# Altium PCB genericShield.PcbDoc
Units mm, origin at the board's own origin, x right, y up, seen from the top; angles counter-clockwise.
Board outline 67.89 x 33.03 mm, 2 copper layers (Top Layer, Bottom Layer); 1 components, 9 nets, 40 pads, 0 vias.
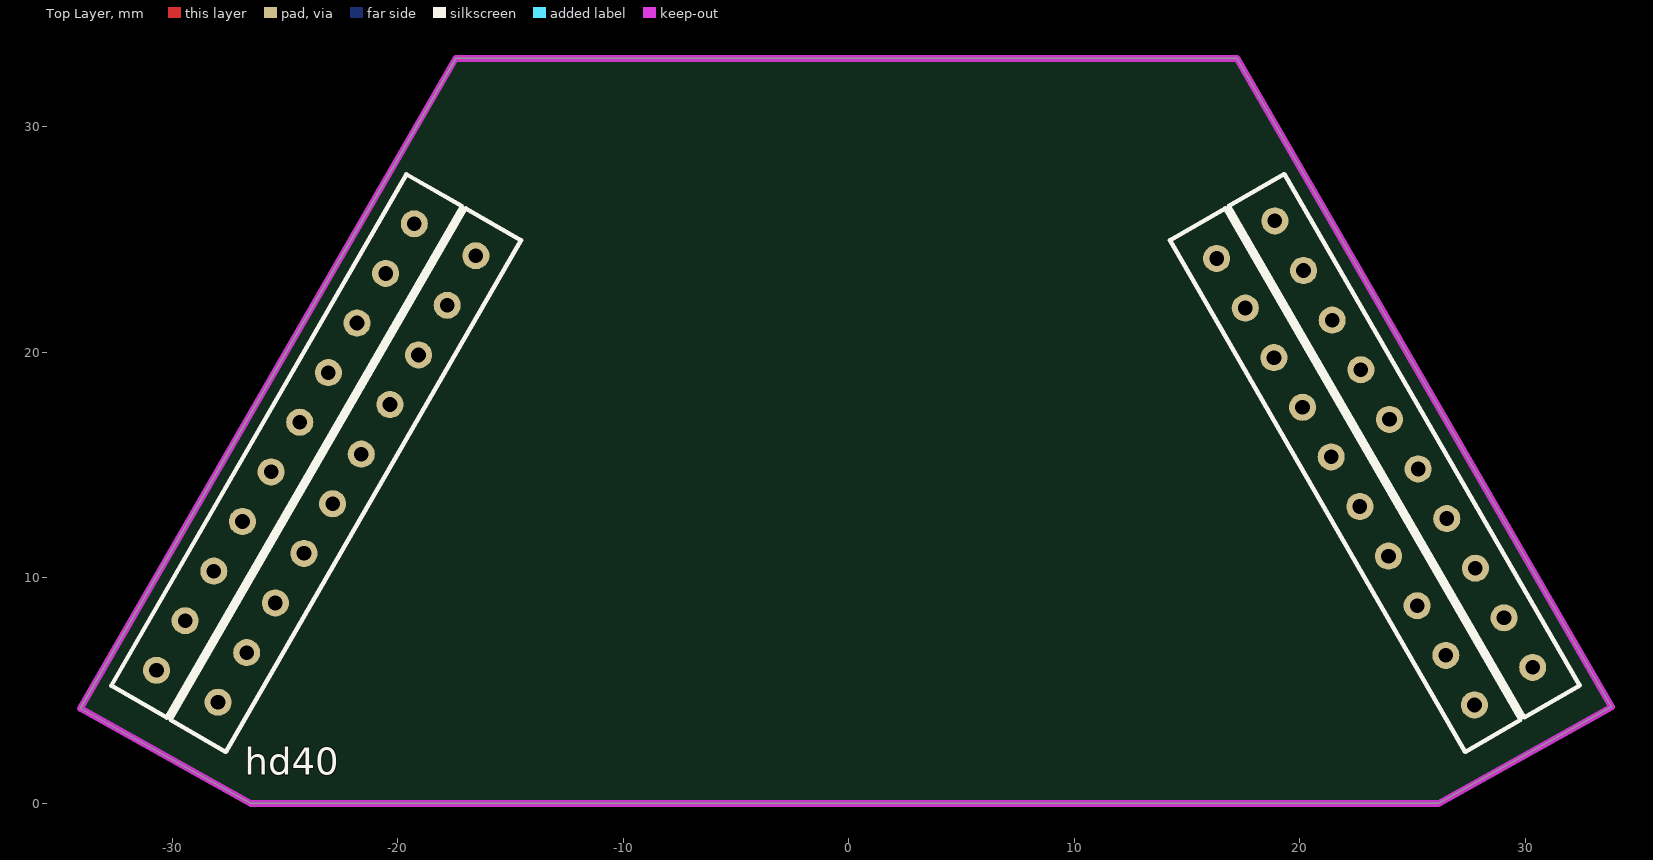
[diagram p0: Top Layer view]
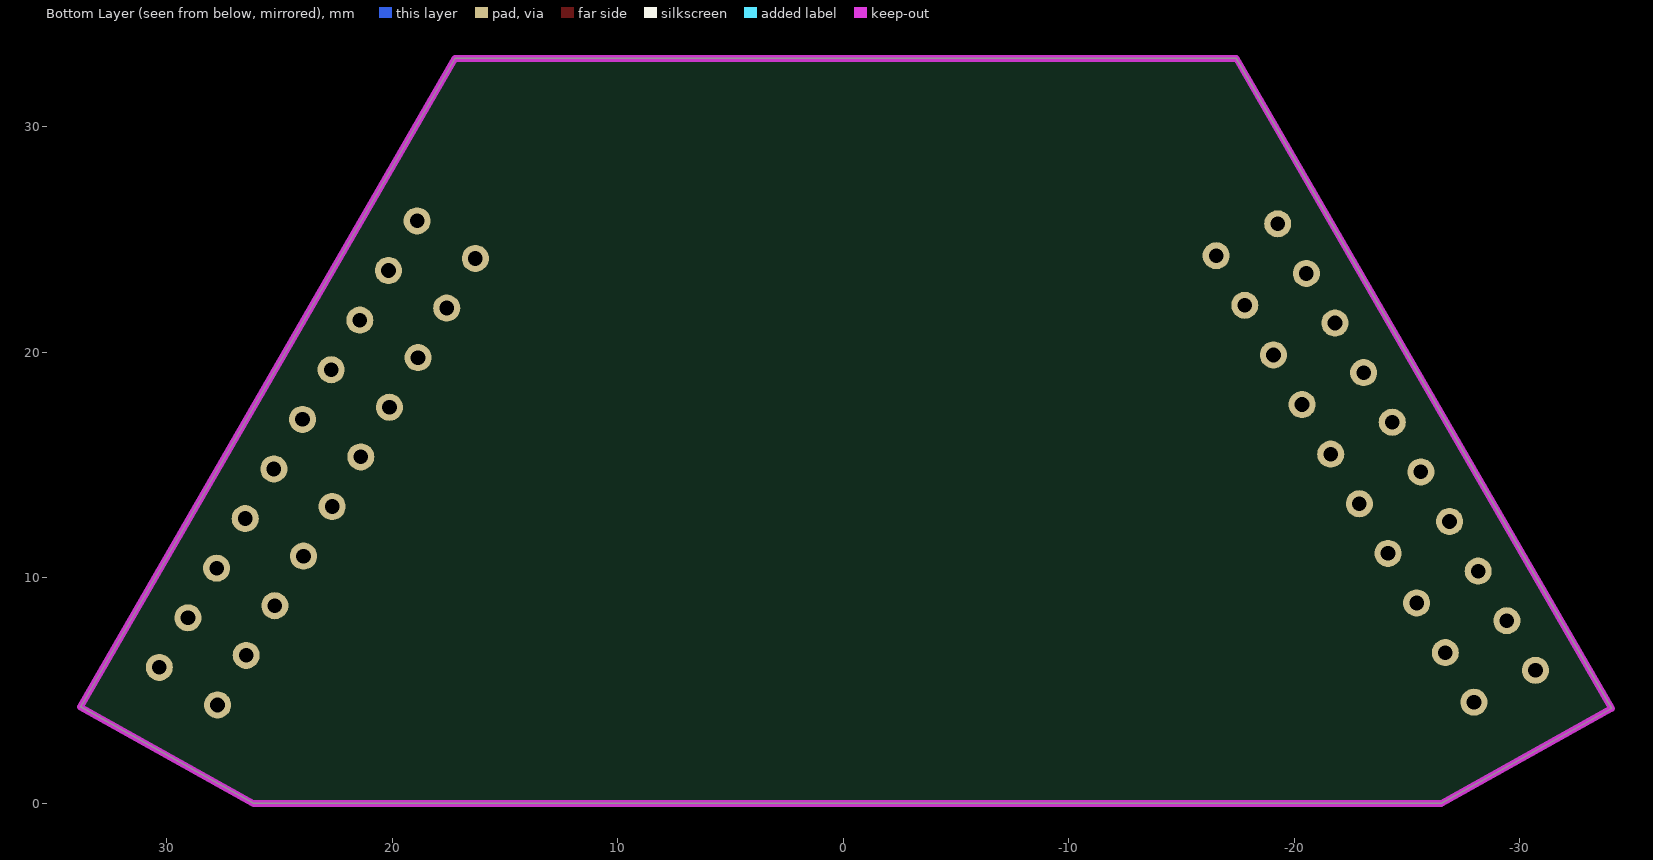
[diagram p1: Bottom Layer view, seen from below]

## Layer stack, top to bottom
Top Layer: signal copper 0.0356
Dielectric: dielectric 0.32, FR-4, Dk 4.8
Bottom Layer: signal copper 0.0356

## Board outline
-26.52,0 26.151,0 33.821,4.281 33.815,4.277 17.213,33.03 -17.427,33.03 -34.067,4.212 -34.056,4.206

## Design rules (kind name [scope] priority, off if disabled: settings)
Clearance pic_clearance [InComponent('U1')] p1: gap=0.1
Clearance [All] p2: gap=0.2
PolygonConnect [All] p1: connectstyle=Relief reliefconductorwidth=0.254 reliefentries=4 polygonreliefangle="90 Angle" airgapwidth=0.254
RoomDefinition chargerShield [InComponentClass('chargerShield')] p1 off: confinementstyle=ConfineIn formatcopy=TRUE lockcomponents=FALSE outline -169.867,-198.98 -119.067,-198.98 -119.067,-173.58 -169.867,-173.58
RoutingVias [All] p1: holewidth=0.4 width=0.8 viastyle="Through Hole" minholewidth=0 minwidth=0.6 maxholewidth=1 maxwidth=1.4
SilkToSolderMaskClearance SilkscreenOverComponentPads [IsPad] p1: minsilkscreentomaskgap=0.254 clearancetoexposedcopper=TRUE
SolderMaskExpansion [All] p1: expansion=0.102
Width "VCC 5" [InNet('VCC5.0_POWER')] p1: maxlimit=2 minlimit=0.2 preferedwidth=1.2 minimp=50.000000 maximp=50.000000 favimp=50.000000
Width VCC [InNet('VCC')] p2: maxlimit=2 minlimit=0.2 preferedwidth=1.2
Width GND [InNet('GND')] p3: maxlimit=2 minlimit=0.2 preferedwidth=1.2 minimp=50.000000 maximp=50.000000 favimp=50.000000
Width [All] p4: maxlimit=2 minlimit=0.2 preferedwidth=1.2 minimp=50.000000 maximp=50.000000 favimp=50.000000
27 further rules are at their usual default settings.

## Components (designator, comment, footprint, x,y, rotation, side; value= is the part's Value field where it differs from the comment)
hd40 "header_cognitiveNGD_shield" HEADER_COGNITIVENGD_LONGLEGS -15.437,13.08 r0 top locked

## Footprints (in the part's own frame and the unit in brackets; to place one, negate y for a bottom-side part, rotate by r counter-clockwise, add the part's x,y. Pads: shape width x height; smd on the part's side, far side on the other; paste and mask are expansions set on the pad)
HEADER_COGNITIVENGD_LONGLEGS [mm]
  round 1.2 / inner oval 2.5x1.2 / far side round 1.2 hole 0.65: 00(-3.826,12.617) 01(-5.096,10.417) 02(-6.366,8.217) 03(-7.636,6.018) 04(-8.906,3.818) 05(-10.176,1.618) 06(-11.446,-0.581) 07(-12.716,-2.781) 08(-13.986,-4.981) 09(-15.256,-7.181) 10(-12.527,-8.594) 11(-11.257,-6.395) 12(-9.987,-4.195) 13(-8.717,-1.995) 14(-7.447,0.204) 15(-6.177,2.404) 16(-4.907,4.604) 17(-3.637,6.804) 18(-2.367,9.003) 19(-1.097,11.203) 20(31.747,11.082) 21(33.017,8.882) 22(34.287,6.682) 23(35.557,4.483) 24(36.827,2.283) 25(38.097,0.083) 26(39.367,-2.116) 27(40.637,-4.316) 28(41.907,-6.516) 29(43.177,-8.716) 30(45.761,-7.051) 31(44.491,-4.851) 32(43.221,-2.651) 33(41.951,-0.452) 34(40.681,1.748) 35(39.411,3.948) 36(38.141,6.148) 37(36.871,8.347) 38(35.601,10.547) 39(34.331,12.747)
  silkscreen extent -17.26,-10.79 47.84,14.82, body extent -16.97,-10.43 47.5,14.46, height 7

## Part data
hd40: library part header_cognitiveNGD

## Nets (pads, with @x,y where several pads share a name; then routed paths per layer and width w, separated by ;. In a path a pad name is that pad's centre, name@x,y a point inside that pad or via, vN(x,y) a via of type N, cw(c..) or ccw(c..) an arc to the next point about the centre after c; other vN are vias at no path point)
GND: 
NetC1_1: 
NetD1_1: hd40.30
NetLED_full_1: 
NetLED_full_2: 
NetQ1_1: 
NetR1_1: 
NetR5_2: 
VCC: hd40.29
pads on no net: hd40.00 hd40.01 hd40.02 hd40.03 hd40.04 hd40.05 hd40.06 hd40.07 hd40.08 hd40.09 hd40.10 hd40.11 hd40.12 hd40.13 hd40.14 hd40.15 hd40.16 hd40.17 hd40.18 hd40.19 hd40.20 hd40.21 hd40.22 hd40.23 hd40.24 hd40.25 hd40.26 hd40.27 hd40.28 hd40.31 hd40.32 hd40.33 hd40.34 hd40.35 hd40.36 hd40.37 hd40.38 hd40.39

## Keep-outs
Keep-Out Layer:
  lines w0.3: -34.067,4.212 -17.427,33.03 17.213,33.03 33.815,4.277 ; -34.056,4.206 -26.52,0 26.151,0 33.821,4.281